# Altium PCB pcb_take2.PcbDoc (part 3 of 3)
Units mm, origin at the board's own origin, x right, y up, seen from the top; angles counter-clockwise.
Board outline 120 x 150 mm, 8 copper layers (Top Layer, Power plane, Mid-Layer 1, Mid-Layer 2, Mid-Layer 3, MidLayer4, GND plane, Bottom Layer); 176 components, 197 nets, 1014 pads, 576 vias.
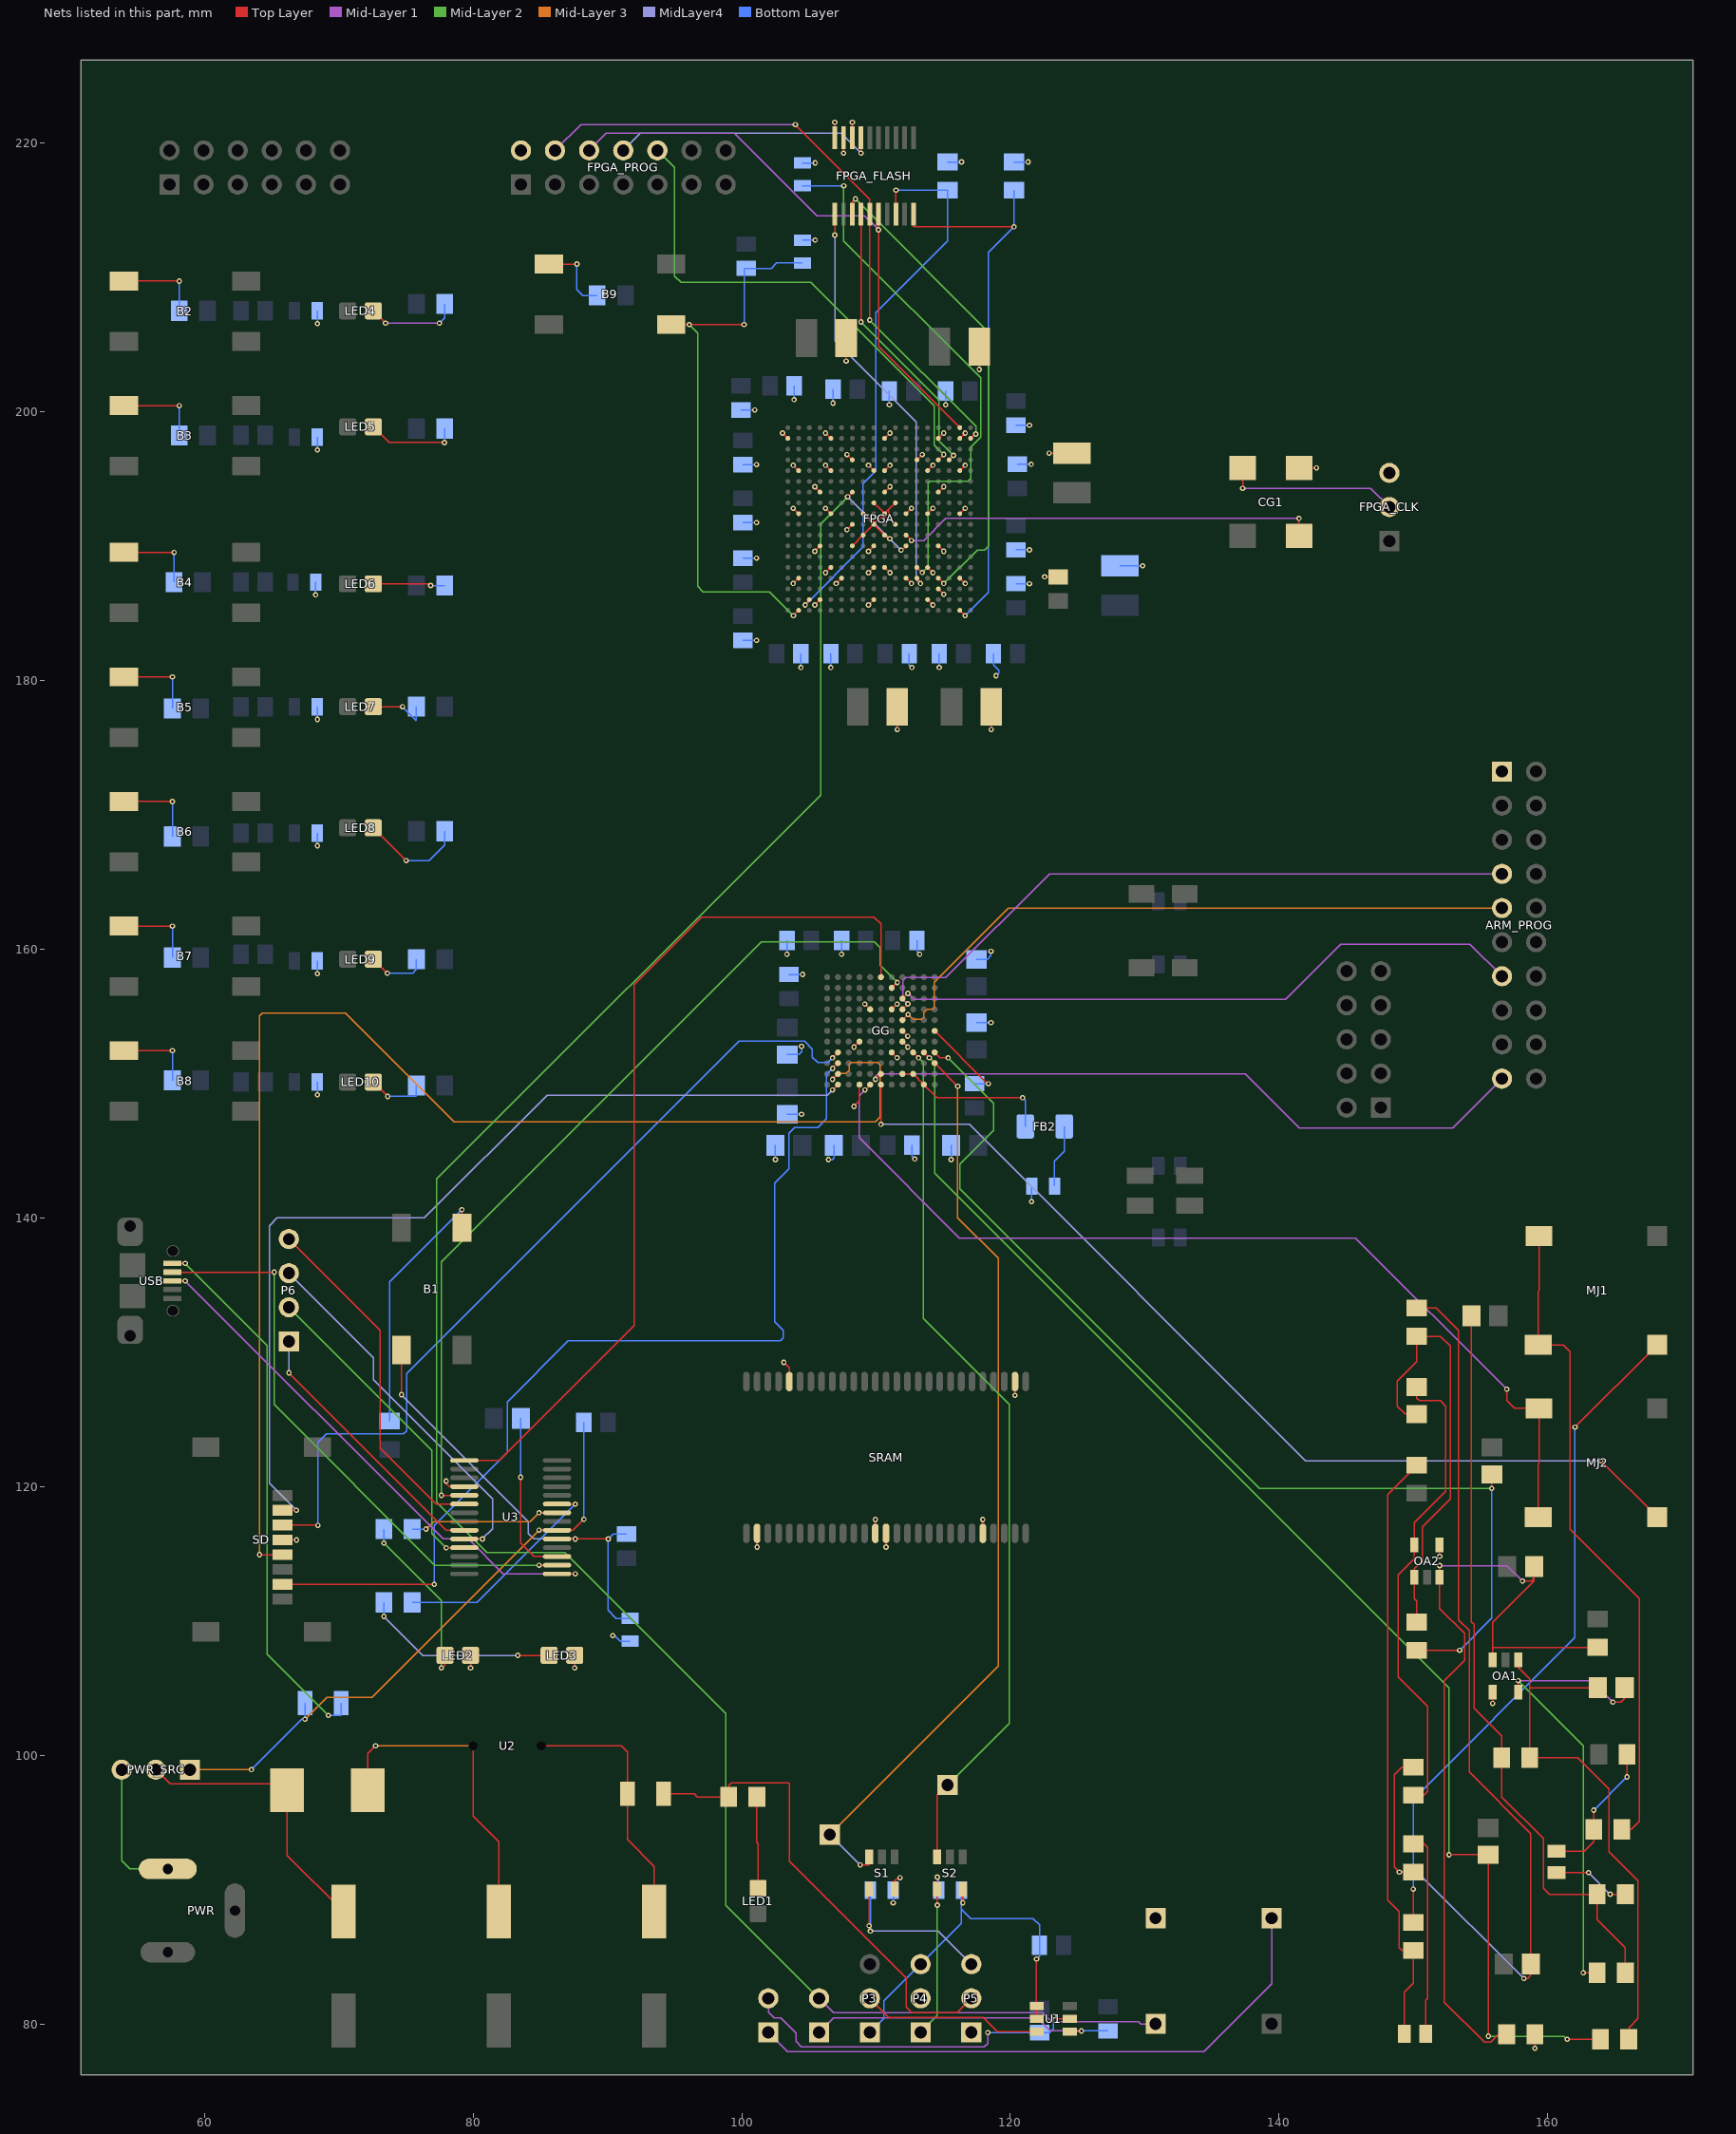
[diagram p9: the nets of this part, all layers, seen from the top]

## Via types
v1: diameter 0.4, hole 0.2, Top Layer to Bottom Layer, 576 vias

## Nets (pads, with @x,y where several pads share a name; then routed paths per layer and width w, separated by ;. In a path a pad name is that pad's centre, name@x,y a point inside that pad or via, vN(x,y) a via of type N, cw(c..) or ccw(c..) an arc to the next point about the centre after c; other vN are vias at no path point) (continued)
Net1_1: 1.1 GG.H10 R35.1 | length 100.8
  Top Layer w0.1: GG.H10@113.563,152.324 v1(113.963,151.924) ; v1(152.654,92.599) 1.1@155.575,92.599 v1(155.575,79.096) ; v1(161.442,78.867) R35.1@163.923,78.867
  Mid-Layer 2 w0.1: v1(113.963,151.924) 114.351,151.536 114.351,143.33 152.654,105.027 v1(152.654,92.599) ; v1(155.575,79.096) 161.214,79.096 v1(161.442,78.867)
Net2_1: 2.1 OA1.3 OA2.3 R36.1 R37.1 | length 63.6
  Top Layer w0.1: v1(151.953,114.122) OA2.3@151.953,113.261 151.953,110.937 153.797,109.093 153.797,107.066 152.298,105.568 152.298,81.636 155.296,78.638 155.753,78.638 156.362,79.248 R36.1@156.938,79.248 ; OA1.3@155.895,107.118 155.895,107.965 ; v1(158.115,112.979) 158.785,112.979 158.988,113.182 ; 2.1@158.988,114.046 158.988,113.182 ; R37.1@163.703,108.043 155.973,108.043 155.895,107.965 ; 155.895,107.965 155.895,109.896 158.988,112.989 158.988,113.182
  Mid-Layer 1 w0.1: v1(151.953,114.122) 156.972,114.122 v1(158.115,112.979)
Net3_1: 3.1 GG.H11 R43.1 | length 79.5
  Top Layer w0.1: GG.H11@114.363,152.324 114.77,151.917 v1(115.367,151.917) ; R43.1@150.241,107.823 v1(153.441,107.823) ; v1(155.829,119.863) 3.1@155.829,120.92
  Mid-Layer 2 w0.1: v1(115.367,151.917) 118.745,148.539 118.745,146.533 116.23,144.018 116.23,142.171 138.539,119.863 v1(155.829,119.863)
  Bottom Layer w0.1: v1(153.441,107.823) 155.829,110.211 v1(155.829,119.863)
NetARM_PROG_19: ARM_PROG.19 GG.K6 | length 50.8
  Top Layer w0.1: v1(109.957,150.317) 110.16,150.52 110.363,150.52 GG.K6@110.363,150.724
  Mid-Layer 1 w0.1: v1(109.957,150.317) 109.957,150.52 110.16,150.724 137.49,150.724 141.503,146.71 152.933,146.71 ARM_PROG.19@156.591,150.368
NetB1_1: B1.1 C51.2 R7.1 U3.19 | length 33.8
  Top Layer w0.1: v1(74.676,126.848) B1.1@74.676,130.175 ; U3.19@86.254,116.104 v1(87.605,116.103) v1(90.069,116.104)
  MidLayer4 w0.1: v1(74.676,126.848) 84.125,117.399 84.125,116.51 84.531,116.103 v1(87.605,116.103)
  Bottom Layer w0.1: C51.2@91.44,116.47 90.435,116.47 v1(90.069,116.104) 90.043,116.078 90.043,110.805 90.651,110.197 R7.1@91.69,110.197
NetB1_3: B1.3 R8.1 | length 19.3
  Top Layer w0.1: v1(79.172,140.614) 79.176,140.61 B1.3@79.176,139.275
  Bottom Layer w0.1: R8.1@73.787,124.875 73.787,135.23 v1(79.172,140.614)
NetB2_3: B2.3 R11.1 | length 6.3
  Top Layer w0.1: B2.3@54.019,209.732 v1(58.132,209.732)
  Bottom Layer w0.1: R11.1@58.132,207.518 v1(58.132,209.732)
NetB3_3: B3.3 R14.1 | length 6.3
  Top Layer w0.1: B3.3@54.019,200.461 v1(58.132,200.461)
  Bottom Layer w0.1: R14.1@58.132,198.247 v1(58.132,200.461)
NetB4_3: B4.3 R20.1 | length 5.9
  Top Layer w0.1: B4.3@54.019,189.539 v1(57.751,189.539)
  Bottom Layer w0.1: R20.1@57.751,187.325 v1(57.751,189.539)
NetB5_3: B5.3 R21.1 | length 5.9
  Top Layer w0.1: B5.3@54.019,180.268 v1(57.624,180.268)
  Bottom Layer w0.1: R21.1@57.624,177.927 v1(57.624,180.268)
NetB6_3: B6.3 R22.1 | length 6.2
  Top Layer w0.1: B6.3@54.019,170.997 v1(57.624,170.997)
  Bottom Layer w0.1: R22.1@57.624,168.402 v1(57.624,170.997)
NetB7_3: B7.3 R23.1 | length 5.9
  Top Layer w0.1: B7.3@54.019,161.726 v1(57.624,161.726)
  Bottom Layer w0.1: R23.1@57.624,159.385 v1(57.624,161.726)
NetB8_3: B8.3 R24.1 | length 5.8
  Top Layer w0.1: B8.3@54.019,152.455 v1(57.624,152.455)
  Bottom Layer w0.1: R24.1@57.624,150.241 v1(57.624,152.455)
NetB9_1: B9.1 C65.2 FPGA.V2 R47.1 | length 42.5
  Top Layer w0.1: B9.1@94.742,206.502 v1(96.088,206.502) v1(100.178,206.502) ; v1(103.848,184.836) FPGA.V2@104.236,185.224
  Mid-Layer 2 w0.1: v1(96.088,206.502) 96.723,205.867 96.723,187.007 97.13,186.601 102.083,186.601 v1(103.848,184.836)
  Bottom Layer w0.1: v1(100.178,206.502) 100.178,210.682 C65.2@100.33,210.682 102.21,210.682 102.61,211.082 R47.1@104.521,211.082
NetB9_3: B9.3 R48.1 | length 5.7
  Top Layer w0.1: B9.3@85.642,211.002 v1(87.732,211.002)
  Bottom Layer w0.1: v1(87.732,211.002) 87.732,209.118 88.189,208.661 R48.1@89.247,208.661
NetC1_1: C1.1 GG.F11 | length 6.7
  Top Layer w0.1: GG.F11@114.363,153.924 118.3,149.987 v1(118.364,149.987)
  Bottom Layer w0.1: C1.1@117.348,149.998 118.353,149.998 v1(118.364,149.987)
NetC43_1: C43.1 P2.1 U1.4 | length 23.2
  Top Layer w0.1: U1.4@124.415,79.441 125.237,79.441 v1(125.287,79.491)
  Mid-Layer 1 w0.1: P2.1@105.759,79.375 106.826,80.442 121.996,80.442 122.947,79.491 v1(125.287,79.491)
  Bottom Layer w0.1: v1(125.287,79.491) C43.1@127.254,79.491
NetC44_2: C44.2 P1.2 U1.5 | length 27
  Top Layer w0.1: v1(123.215,80.594) 123.419,80.391 U1.5@124.415,80.391
  Mid-Layer 1 w0.1: P1.2@101.981,81.915 101.981,80.874 102.413,80.442 102.921,80.442 104.038,79.324 104.038,78.715 104.445,78.308 118.059,78.308 118.313,78.562 v1(118.313,79.364)
  Bottom Layer w0.1: v1(118.313,79.364) C44.2@122.174,79.364 122.936,79.364 123.215,79.643 v1(123.215,80.594)
NetC45_1: C45.1 P3.1 P4.3 R2.1 S2.5 U1.1 U1.2 | length 28
  Top Layer w0.1: v1(116.459,89.027) S2.5@116.459,90.043 ; v1(121.945,84.836) 121.945,81.341 U1.1@121.965,81.341 U1.2@121.965,80.391
  Bottom Layer w0.1: P3.1@109.537,79.375 110.592,80.429 110.592,81.731 P4.3@113.316,84.455 116.359,87.498 116.359,88.543 ; R2.1@116.359,89.973 v1@116.359,89.127 ; v1(116.459,89.027) v1@116.359,89.127 ; v1(121.945,84.836) 122.163,85.054 C45.1@122.163,85.852 122.163,87.376 121.68,87.859 117.043,87.859 116.359,88.543 ; 116.359,88.543 116.359,89.027 v1@116.359,89.127
NetC46_1: C46.1 L1.1 PWR_SRC.2 | length 21.5
  Top Layer w0.1: PWR_SRC.2@56.388,98.933 57.455,97.866 66.167,97.866 L1.1@66.167,97.409 66.167,92.555 C46.1@70.358,88.364
NetC47_1: C47.1 L1.2 U2.1 | length 23.9
  Top Layer w0.1: L1.2@72.167,97.409 72.167,100.132 v1(72.746,100.711) ; U2.1@80.01,100.711 80.01,95.479 81.915,93.574 C47.1@81.915,88.364
  Mid-Layer 3 w0.1: v1(72.746,100.711) U2.1@80.01,100.711
NetC48_1: C48.1 FB1.1 U2.3 | length 19.3
  Top Layer w0.1: U2.3@85.09,100.711 91.034,100.711 91.487,100.258 FB1.1@91.487,97.126 91.487,93.73 93.472,91.745 C48.1@93.472,88.364
NetC50_1: C50.1 U3.17 | length 12.4
  Top Layer w0.1: v1(83.55,120.701) 83.55,115.785 84.531,114.804 U3.17@86.254,114.804
  Bottom Layer w0.1: v1(83.55,120.701) C50.1@83.55,125.095
NetC59_1: C59.1 OA1.1 R30.1 R35.2 | length 39.4
  Top Layer w0.1: OA1.1@157.795,107.118 157.795,106.543 158.657,105.681 158.657,105.029 ; C59.1@163.719,105.029 158.657,105.029 ; R35.2@166.023,78.867 166.023,79.731 166.7,80.408 166.7,90.678 164.567,92.812 164.567,97.485 162.23,99.822 R30.1@158.657,99.822 158.657,105.029
NetC59_2: C59.2 OA1.5 R34.1 | length 35.1
  Top Layer w0.1: OA1.5@157.795,104.718 v1(157.795,105.562) ; v1(162.636,83.82) R34.1@163.669,83.82 ; v1(164.846,103.962) 165.44,103.962 165.719,104.242 C59.2@165.719,105.029
  Mid-Layer 1 w0.1: v1(157.795,105.562) 163.246,105.562 v1(164.846,103.962)
  Mid-Layer 2 w0.1: v1(157.795,105.562) 162.636,100.721 v1(162.636,83.82)
NetC60_1: C60.1 R33.2 | length 5.8
  Top Layer w0.1: C60.1@160.655,91.275 v1(163.03,91.275) ; v1(164.643,89.662) R33.2@165.769,89.662
  MidLayer4 w0.1: v1(163.03,91.275) v1(164.643,89.662)
NetC60_2: C60.2 R31.2 R32.1 | length 10.6
  Top Layer w0.1: C60.2@160.655,92.875 162.707,92.875 163.415,93.583 R32.1@163.415,94.488 v1(163.415,95.919) ; v1(165.896,98.4) R31.2@165.896,100.076
  Bottom Layer w0.1: v1(163.415,95.919) v1(165.896,98.4)
NetC61_1: C61.1 R30.2 R33.1 R34.2 | length 55.7
  Top Layer w0.1: C61.1@154.321,132.715 154.321,109.949 154.505,109.765 154.505,103.5 156.557,101.448 R30.2@156.557,99.822 156.557,96.91 159.664,93.802 159.664,90.119 160.122,89.662 R33.1@163.669,89.662 163.669,87.774 165.769,85.674 R34.2@165.769,83.82
NetC62_1: C62.1 OA2.1 R38.1 R43.2 | length 32
  Top Layer w0.1: R43.2@150.241,109.923 150.241,111.481 150.053,111.669 OA2.1@150.053,113.261 150.053,113.883 150.673,114.503 150.673,117.018 152.756,119.101 152.756,130.454 152.019,131.191 R38.1@150.241,131.191 150.241,129.311 148.793,127.864 148.793,125.984 149.378,125.399 C62.1@150.241,125.399
NetC62_2: C62.2 OA2.5 R42.1 | length 35.4
  Top Layer w0.1: R42.1@149.987,97.028 150.774,97.028 151.054,97.307 151.054,103.654 148.868,105.84 148.868,113.445 150.053,114.63 OA2.5@150.053,115.661 150.053,117.312 152.4,119.659 152.4,125.984 151.994,126.39 150.444,126.39 150.241,126.594 C62.2@150.241,127.399
NetC63_1: C63.1 R41.2 | length 15.1
  Top Layer w0.1: R41.2@149.987,93.413 150.774,93.413 151.054,93.134 151.054,81.915 150.914,81.775 C63.1@150.914,79.282
NetC63_2: C63.2 R39.2 R40.1 | length 44.8
  Top Layer w0.1: C63.2@149.314,79.282 149.314,82.372 149.987,83.045 R40.1@149.987,85.471 149.149,85.471 148.92,85.7 148.92,88.392 148.082,89.23 148.082,119.405 150.241,121.564 R39.2@150.241,121.607
NetC64_1: C64.1 R38.2 R41.1 R42.2 | length 77.3
  Top Layer w0.1: R41.1@149.987,91.313 v1(148.946,91.313) 148.565,91.694 148.565,98.544 149.149,99.128 R42.2@149.987,99.128 ; R38.2@150.241,133.291 151.697,133.291 153.365,131.623 153.365,110.084 154.151,109.298 154.151,98.757 158.734,94.174 C64.1@158.734,84.455 158.734,83.626 158.496,83.388 v1(158.217,83.388)
  MidLayer4 w0.1: v1(148.946,91.313) 150.292,91.313 v1(158.217,83.388)
NetCG1_1: CG1.1 FPGA_CLK.2 | length 13
  Top Layer w0.1: v1(137.287,194.31) CG1.1@137.287,195.834
  Mid-Layer 1 w0.1: v1(137.287,194.31) 146.812,194.31 FPGA_CLK.2@148.209,192.913
NetCG1_3: CG1.3 FPGA.L12 | length 31.4
  Top Layer w0.1: FPGA.L12@112.236,190.824 v1(112.636,190.424) ; CG1.3@141.487,190.754 v1(141.487,192.066)
  Mid-Layer 1 w0.1: v1(112.636,190.424) 113.538,190.424 115.18,192.066 v1(141.487,192.066)
NetFB1_2: FB1.2 P5.2 R3.2 | length 36.1
  Top Layer w0.1: FB1.2@94.187,97.126 96.469,97.126 96.694,96.901 R3.2@99.026,96.901 99.026,97.739 99.246,97.959 103.488,97.959 103.556,97.892 103.556,92.126 112.243,83.439 112.243,81.28 112.662,80.861 116.04,80.861 P5.2@117.094,81.915
NetFB2_1: FB2.1 GG.K8 GG.K9 GG.L10 | length 11.9
  Top Layer w0.1: GG.K8@111.963,150.724 GG.K9@112.763,150.724 112.763,150.712 113.551,149.924 GG.L10@113.563,149.924 114.541,148.946 v1(120.904,148.946)
  Bottom Layer w0.1: v1(120.904,148.946) 121.105,148.745 FB2.1@121.105,146.812
NetFB2_2: FB2.2 R1.1 | length 4.7
  Bottom Layer w0.1: R1.1@123.278,142.367 123.278,144.221 124.005,144.948 FB2.2@124.005,146.812
NetFB3_1: FB3.1 USB.1 | length 40.9
  Top Layer w0.1: USB.1@57.608,136.616 v1(58.572,136.616)
  Mid-Layer 2 w0.1: v1(58.572,136.616) 64.668,130.52 64.668,107.544 v1(69.237,102.975)
  Bottom Layer w0.1: v1(69.237,102.975) 70.184,102.975 FB3.1@70.184,103.886
NetFPGA_A17: FPGA.A17 FPGA_FLASH.6 FPGA_PROG.6 | length 43.4
  Top Layer w0.1: FPGA_FLASH.6@110.18,214.701 v1(110.18,213.551) 110.18,204.88 FPGA.A17@116.236,198.824
  Mid-Layer 1 w0.1: FPGA_PROG.6@88.646,219.456 89.916,220.726 99.466,220.726 105.613,214.579 109.152,214.579 v1(110.18,213.551)
NetFPGA_B18: FPGA.B18 FPGA_FLASH.5 FPGA_PROG.4 | length 47.8
  Top Layer w0.1: v1(103.988,221.386) 109.53,215.844 FPGA_FLASH.5@109.53,214.701 v1(109.53,206.827) ; FPGA.B18@117.036,198.024 117.361,198.349 v1(117.424,198.349)
  Mid-Layer 1 w0.1: FPGA_PROG.4@86.106,219.456 88.036,221.386 v1(103.988,221.386)
  Mid-Layer 2 w0.1: v1(109.53,206.827) 117.424,198.933 v1(117.424,198.349)
NetFPGA_D15: FPGA.D15 FPGA_PROG.10 | length 37.7
  Top Layer w0.1: FPGA.D15@114.636,196.424 v1(115.036,196.825)
  Mid-Layer 2 w0.1: FPGA_PROG.10@93.726,219.456 94.996,218.186 94.996,210.109 95.479,209.626 105.156,209.626 114.325,200.457 114.325,197.535 v1(115.036,196.825)
NetFPGA_D16: FPGA.D16 FPGA_FLASH.4 | length 21.3
  Top Layer w0.1: v1(108.88,206.69) FPGA_FLASH.4@108.88,214.701 ; FPGA.D16@115.436,196.424 v1(115.767,196.755)
  Mid-Layer 2 w0.1: v1(108.88,206.69) 114.681,200.889 114.681,197.841 v1(115.767,196.755)
NetFPGA_FLASH_17: FPGA_FLASH.17 FPGA_PROG.8 | length 20
  Top Layer w0.1: v1(108.88,219.253) FPGA_FLASH.17@108.88,220.401
  MidLayer4 w0.1: FPGA_PROG.8@91.186,219.456 92.456,220.726 107.407,220.726 v1(108.88,219.253)
NetFPGA_P13: FPGA.P13 R46.1 | length 40.1
  Top Layer w0.1: FPGA.P13@113.036,188.424 113.424,188.036 v1(113.436,188.036)
  Mid-Layer 2 w0.1: v1(107.594,216.828) 107.594,212.725 117.786,202.533 117.786,198.107 117.069,197.39 117.069,195.047 116.84,194.818 113.995,194.818 113.868,194.691 113.868,188.468 v1(113.436,188.036)
  Bottom Layer w0.1: R46.1@104.521,216.828 v1(107.594,216.828)
NetFPGA_R13: FPGA.R13 FPGA_FLASH.1 | length 30.6
  Top Layer w0.1: v1(106.93,213.157) FPGA_FLASH.1@106.93,214.701 ; FPGA.R13@113.036,187.624 113.309,187.351 v1(113.309,187.223)
  MidLayer4 w0.1: v1(106.93,213.157) 106.93,205.312 113.005,199.238 113.005,187.528 v1(113.309,187.223)
NetFPGA_R15: FPGA.R15 FPGA_FLASH.3 | length 36.2
  Top Layer w0.1: FPGA_FLASH.3@108.23,214.701 108.23,215.621 v1(108.458,215.849) ; FPGA.R15@114.636,187.624 v1(115.037,187.223)
  Mid-Layer 2 w0.1: v1(108.458,215.849) 118.362,205.945 118.362,189.992 118.09,189.72 117.533,189.72 v1(115.037,187.223)
NetFPGA_U3: FPGA.U3 FPGA_FLASH.8 R44.2 | length 41.4
  Top Layer w0.1: v1(104.724,185.623) 104.724,185.712 FPGA.U3@105.036,186.024 ; FPGA_FLASH.8@111.48,214.701 v1(111.48,216.501)
  Bottom Layer w0.1: v1(104.724,185.623) 109.042,189.941 109.042,194.666 109.986,195.609 109.986,207.395 115.316,212.725 R44.2@115.316,216.501 v1(111.48,216.501)
NetFPGA_V17: FPGA.V17 FPGA_FLASH.10 R45.2 | length 42.1
  Top Layer w0.1: FPGA_FLASH.10@112.78,214.701 112.78,213.766 v1(120.269,213.766) ; FPGA.V17@116.236,185.224 v1(116.624,184.836)
  Bottom Layer w0.1: v1(116.624,184.836) 118.358,186.57 118.358,211.856 v1(120.269,213.766) R45.2@120.269,216.501
NetGG_A6: GG.A6 U3.1 | length 66.8
  Top Layer w0.1: U3.1@79.354,121.954 81.966,121.954 91.999,131.987 91.999,157.378 97.024,162.404 109.834,162.404 110.363,161.874 GG.A6@110.363,157.924
NetGG_B7: GG.B7 U3.5 | length 65.5
  Top Layer w0.1: v1(77.648,119.355) U3.5@79.354,119.354 ; GG.B7@111.163,157.124 111.57,157.531 v1(111.582,157.531)
  Mid-Layer 2 w0.1: v1(77.648,119.355) 77.648,136.728 101.473,160.553 109.88,160.553 110.312,160.122 110.312,158.801 v1(111.582,157.531)
NetGG_H9: GG.H9 S2.3 SNS_GGFP.1 | length 65.1
  Top Layer w0.1: GG.H9@112.763,152.324 v1(113.17,151.917) ; S2.3@114.559,92.443 114.559,97.033 SNS_GGFP.1@115.316,97.79
  Mid-Layer 2 w0.1: v1(113.17,151.917) 113.513,151.574 113.513,132.537 119.913,126.136 119.913,102.387 SNS_GGFP.1@115.316,97.79
NetGG_J11: GG.J11 S1.3 SNS33.1 | length 69
  Top Layer w0.1: v1(108.814,91.846) 109.479,91.846 S1.3@109.479,92.443 ; GG.J11@114.363,151.524 v1(116.078,149.809)
  Mid-Layer 3 w0.1: SNS33.1@106.553,94.107 119.101,106.655 119.101,137.008 116.078,140.03 v1(116.078,149.809)
  MidLayer4 w0.1: SNS33.1@106.553,94.107 v1(108.814,91.846)
NetGG_L5: GG.L5 MJ2.2 | length 71.9
  Top Layer w0.1: v1(109.169,149.53) 109.194,149.53 109.563,149.899 GG.L5@109.563,149.924 ; v1(156.947,127.254) 156.947,126.39 157.508,125.829 MJ2.2@159.348,125.829 159.348,121.792 159.298,121.742 MJ2.2@159.298,117.729
  Mid-Layer 1 w0.1: v1(109.169,149.53) 108.737,149.098 108.737,145.974 116.205,138.506 145.694,138.506 v1(156.947,127.254)
NetGG_L6: GG.L6 MJ2.1 | length 72.9
  Top Layer w0.1: v1(110.363,146.964) GG.L6@110.363,149.924 ; v1(163.957,121.92) MJ2.1@168.148,117.729
  MidLayer4 w0.1: v1(110.363,146.964) 116.942,146.964 141.986,121.92 v1(163.957,121.92)
NetLED1_A: LED1.A R3.1 | length 6.8
  Top Layer w0.1: R3.1@101.126,96.901 101.126,93.54 101.219,93.447 LED1.A@101.219,90.106
NetLED2_K: LED2.K R5.1 | length 13.2
  Top Layer w0.1: v1(77.648,106.502) 77.915,106.769 LED2.K@77.915,107.442
  Mid-Layer 2 w0.1: v1(73.372,115.799) 77.648,111.523 v1(77.648,106.502)
  Bottom Layer w0.1: v1(73.372,115.799) R5.1@73.372,116.84
NetLED3_K: LED3.K R6.1 | length 14.5
  Top Layer w0.1: v1(83.337,107.442) LED3.K@85.661,107.442
  MidLayer4 w0.1: v1(73.372,110.338) 76.268,107.442 v1(83.337,107.442)
  Bottom Layer w0.1: v1(73.372,110.338) R6.1@73.372,111.379
NetLED4_A: LED4.A R12.1 | length 6.9
  Top Layer w0.1: LED4.A@72.581,207.518 v1(73.495,206.604)
  Mid-Layer 1 w0.1: v1(73.495,206.604) v1(77.495,206.604)
  Bottom Layer w0.1: v1(77.495,206.604) 77.885,206.993 R12.1@77.885,208.026
NetLED5_A: LED5.A R13.1 | length 6.8
  Top Layer w0.1: LED5.A@72.581,198.882 73.749,197.714 v1(77.876,197.714)
  Bottom Layer w0.1: v1(77.876,197.714) 77.885,197.722 R13.1@77.885,198.755
NetLED6_A: LED6.A R25.1 | length 5.4
  Top Layer w0.1: LED6.A@72.581,187.198 76.717,187.198 v1(76.844,187.071)
  Bottom Layer w0.1: v1(76.844,187.071) R25.1@77.885,187.071
NetLED7_A: LED7.A R26.1 | length 4.7
  Top Layer w0.1: LED7.A@72.581,178.054 v1(74.752,178.054)
  Bottom Layer w0.1: v1(74.752,178.054) 75.785,177.021 R26.1@75.785,178.054
NetLED8_A: LED8.A R27.1 | length 7.8
  Top Layer w0.1: LED8.A@72.581,169.037 v1(75.019,166.599)
  Bottom Layer w0.1: v1(75.019,166.599) 76.733,166.599 77.885,167.75 R27.1@77.885,168.783
NetLED9_A: LED9.A R28.1 | length 4.5
  Top Layer w0.1: LED9.A@72.581,159.258 v1(73.622,158.217)
  Bottom Layer w0.1: v1(73.622,158.217) 75.506,158.217 75.785,158.496 R28.1@75.785,159.258
NetLED10_A: LED10.A R29.1 | length 4.5
  Top Layer w0.1: LED10.A@72.581,150.114 v1(73.647,149.047)
  Bottom Layer w0.1: v1(73.647,149.047) 75.785,149.047 R29.1@75.785,149.86
NetMJ1_1: MJ1.1 R40.2 | length 50.5
  Top Layer w0.1: R40.2@149.987,87.571 v1(149.987,90.043) ; v1(162.027,124.435) MJ1.1@168.148,130.556
  Bottom Layer w0.1: v1(149.987,90.043) 149.987,96.72 162.027,108.76 v1(162.027,124.435)
NetMJ1_2: MJ1.2 R32.2 | length 49.4
  Top Layer w0.1: MJ1.2@159.348,138.656 159.348,134.619 159.298,134.569 MJ1.2@159.298,130.556 161.163,130.556 161.671,130.048 161.671,116.84 166.827,111.684 166.827,95.098 166.218,94.488 R32.2@165.515,94.488
NetP3_2: P3.2 U1.3 | length 13.5
  Top Layer w0.1: P3.2@109.537,81.915 110.946,80.507 117.969,80.507 119.035,79.441 U1.3@121.965,79.441
NetP4_1: P4.1 R2.2 S2.4 | length 13.1
  Top Layer w0.1: v1(114.559,88.854) S2.4@114.559,90.043 v1(114.559,90.932)
  Mid-Layer 2 w0.1: P4.1@113.316,79.375 114.559,80.618 v1(114.559,88.854)
  Bottom Layer w0.1: v1(114.559,90.932) 114.659,90.832 R2.2@114.659,89.973
NetP5_3: P5.3 R4.1 S1.4 | length 14.5
  Top Layer w0.1: v1(109.479,87.319) S1.4@109.479,90.043
  MidLayer4 w0.1: v1(109.579,86.919) 114.63,86.919 P5.3@117.094,84.455
  Bottom Layer w0.1: v1(109.479,87.319) v1@109.579,87.419 ; v1(109.579,86.919) v1@109.579,87.419 ; R4.1@109.579,89.973 v1@109.579,87.419
NetP6_1: P6.1 U3.9 | length 20.3
  Top Layer w0.1: v1(66.294,128.473) 78.013,116.754 U3.9@79.354,116.754
  MidLayer4 w0.1: v1(66.294,128.473) P6.1@66.294,130.81
NetP6_2: P6.2 U3.11 | length 24.1
  Top Layer w0.1: v1(78.003,115.454) U3.11@79.354,115.454
  Mid-Layer 2 w0.1: P6.2@66.294,133.35 76.94,122.704 76.94,116.518 v1(78.003,115.454)
NetP6_3: P6.3 U3.10 | length 27.7
  Top Layer w0.1: U3.10@79.354,116.104 v1(80.696,116.104)
  MidLayer4 w0.1: P6.3@66.294,135.89 72.593,129.591 72.593,127.965 81.458,119.101 81.458,116.866 v1(80.696,116.104)
NetP6_4: P6.4 U3.6 | length 26.4
  Top Layer w0.1: P6.4@66.294,138.43 73.101,131.623 73.101,122.87 77.267,118.704 U3.6@79.354,118.704
NetPWR_1: PWR.1 PWR_SRC.3 | length 10.5
  Mid-Layer 2 w0.1: PWR_SRC.3@53.848,98.933 53.848,92.154 54.458,91.544 PWR.1@57.277,91.544
NetR5_2: R5.2 U3.22 | length 11.3
  Top Layer w0.1: v1(84.912,118.054) U3.22@86.254,118.054
  Mid-Layer 3 w0.1: v1(76.505,116.84) 77.064,117.399 84.257,117.399 v1(84.912,118.054)
  Bottom Layer w0.1: R5.2@75.472,116.84 v1(76.505,116.84)
NetR6_2: R6.2 U3.23 | length 16.5
  Top Layer w0.1: U3.23@86.254,118.704 v1(87.605,118.704)
  Bottom Layer w0.1: R6.2@75.472,111.379 80.28,111.379 v1(87.605,118.704)
NetU3_15: U3.15 USB.3 | length 40.4
  Top Layer w0.1: USB.3@57.608,135.316 v1(58.572,135.316) ; U3.15@86.254,113.504 87.596,113.504 v1(87.605,113.513)
  Mid-Layer 1 w0.1: v1(58.572,135.316) 77.785,116.103 79.654,116.103 82.245,113.513 v1(87.605,113.513)
NetU3_16: U3.16 USB.2 | length 43.5
  Top Layer w0.1: USB.2@57.608,135.966 v1(65.202,135.966) ; v1(84.912,114.148) 84.919,114.154 U3.16@86.254,114.154
  Mid-Layer 2 w0.1: v1(65.202,135.966) 65.202,126.111 77.165,114.148 v1(84.912,114.148)
SWCLK: ARM_PROG.9 GG.E8 | length 49.7
  Top Layer w0.1: GG.E8@111.963,154.724 v1(112.382,155.143)
  Mid-Layer 3 w0.1: v1(112.382,155.143) 112.755,154.77 113.386,154.77 113.538,154.922 113.538,155.27 113.792,155.524 114.198,155.524 114.325,155.651 114.325,157.556 119.837,163.068 ARM_PROG.9@156.591,163.068
SWDIO: ARM_PROG.7 GG.D8 | length 50.3
  Top Layer w0.1: GG.D8@111.963,155.524 v1(112.37,155.931)
  Mid-Layer 1 w0.1: v1(112.37,155.931) 112.014,156.286 112.014,157.683 112.217,157.886 115.189,157.886 122.911,165.608 ARM_PROG.7@156.591,165.608
SWO: ARM_PROG.13 GG.C8 | length 47.7
  Top Layer w0.1: GG.C8@111.963,156.324 112.357,156.718 v1(112.37,156.718)
  Mid-Layer 1 w0.1: v1(112.37,156.718) 112.801,156.286 140.48,156.286 144.569,160.376 154.203,160.376 ARM_PROG.13@156.591,157.988
US2_CLK: GG.K2 SD.5 | length 100.5
  Top Layer w0.1: v1(64.11,114.936) SD.5@65.811,114.936 ; v1(106.756,150.317) GG.K2@107.163,150.724
  Mid-Layer 3 w0.1: v1(64.11,114.936) 64.11,155.042 64.313,155.245 70.51,155.245 78.613,147.142 109.957,147.142 110.312,147.498 110.312,151.384 110.134,151.562 108.102,151.562 108.001,151.46 108.001,150.978 107.772,150.749 107.188,150.749 v1(106.756,150.317)
US2_CS: GG.L2 SD.2 | length 69.7
  Top Layer w0.1: SD.2@65.811,118.236 v1(66.853,118.236) ; v1(106.756,149.53) 106.769,149.53 GG.L2@107.163,149.924
  MidLayer4 w0.1: v1(66.853,118.236) 64.846,120.243 64.846,139.421 65.43,140.005 76.378,140.005 85.522,149.149 106.375,149.149 v1(106.756,149.53)
US2_RX: GG.J2 SD.7 | length 73.3
  Top Layer w0.1: SD.7@65.811,112.736 77.104,112.736 v1(77.114,112.725) ; v1(106.769,151.13) GG.J2@107.163,151.524
  Bottom Layer w0.1: v1(77.114,112.725) 77.114,117.119 82.55,122.555 82.55,126.314 87.097,130.861 102.895,130.861 103.098,131.064 103.098,131.652 102.464,132.286 102.464,142.596 103.505,143.637 103.505,146.304 103.937,146.736 105.664,146.736 106.324,147.396 106.324,150.685 v1(106.769,151.13)
US2_TX: GG.H2 SD.3 | length 63.7
  Top Layer w0.1: SD.3@65.811,117.136 68.436,117.136 v1(68.453,117.119) ; v1(106.756,151.917) GG.H2@107.163,152.324
  Bottom Layer w0.1: v1(68.453,117.119) 68.453,123.292 69.088,123.927 74.828,123.927 75.057,124.155 75.057,128.422 99.797,153.162 104.673,153.162 105.258,152.578 105.258,151.968 105.664,151.562 106.401,151.562 v1(106.756,151.917)
VCC12: FPGA.G7 FPGA.H9 FPGA.H11 FPGA.J8 FPGA.J10 FPGA.K9 FPGA.K11 FPGA.L8 FPGA.L10 FPGA.M7 FPGA.M12 P2.2 PWR12.1 | length 182.5
  Top Layer w0.1: v1(107.874,193.675) 107.887,193.675 FPGA.G7@108.236,194.024 ; FPGA.M7@108.236,190.024 108.236,190.031 109.029,190.824 FPGA.L8@109.036,190.824 109.036,190.843 109.817,191.624 FPGA.K9@109.836,191.624 ; FPGA.J8@109.036,192.424 109.639,191.821 110.033,191.821 ; FPGA.H9@109.836,193.224 110.32,192.74 FPGA.J10@110.633,192.421 ; v1(111.023,190.551) 110.947,190.627 110.833,190.627 FPGA.L10@110.636,190.824 FPGA.K9@109.836,191.624 ; FPGA.K11@111.436,191.624 110.952,192.108 ; FPGA.H11@111.436,193.224 110.952,192.74 ; v1(111.866,189.708) 111.92,189.708 FPGA.M12@112.236,190.024 ; FPGA.K9@109.836,191.624 110.033,191.821 ; 110.033,191.821 110.439,192.227 ; 110.439,192.227 FPGA.J10@110.633,192.421 ; 110.439,192.227 110.952,192.108 ; FPGA.J10@110.633,192.421 FPGA.J10@110.636,192.424 110.952,192.74 ; 110.952,192.108 110.952,192.74
  Mid-Layer 1 w0.1: P2.2@105.759,81.915 106.826,80.848 122.377,80.848 123.063,80.162 129.54,80.162 129.692,80.01 PWR12.1@130.81,80.01
  Mid-Layer 2 w0.1: P2.2@105.759,81.915 98.831,88.843 98.831,103.099 86.843,115.087 81.051,115.087 77.294,118.845 77.294,142.902 105.867,171.475 105.867,191.643 v1@107.886,193.662 ; v1(107.874,193.675) v1@107.886,193.662 ; v1(107.899,193.675) v1@107.886,193.662
  MidLayer4 w0.1: v1(107.899,193.675) v1(111.023,190.551) v1(111.866,189.708)
VCC18: P1.1 PWR18.1 | length 45
  Mid-Layer 1 w0.1: P1.1@101.981,79.375 103.402,77.954 134.393,77.954 139.446,83.007 PWR18.1@139.446,87.884
VCC33: ARM_PROG.1 C2.2 C3.2 C4.2 C5.2 C6.2 C7.2 C8.2 C9.2 C10.2 C11.2 C12.2 C13.2 C14.2 C15.2 C16.2 C17.2 C18.2 C19.2 C20.2 C21.2 C22.2 C23.2 C24.2 C25.2 C26.2 C27.2 C28.2 C29.2 C30.2 C31.2 C32.2 C33.2 C34.2 C35.2 C36.2 C37.2 C38.2 CG1.4 FPGA.B1 FPGA.B5 FPGA.B10 FPGA.B15 FPGA.B17 FPGA.D7 FPGA.D13 FPGA.E2 FPGA.E5 FPGA.E9 FPGA.E10 FPGA.E14 FPGA.E17 FPGA.G4 FPGA.G10 FPGA.G15 FPGA.J2 FPGA.J5 FPGA.J12 FPGA.J14 FPGA.J17 FPGA.K7 FPGA.M4 FPGA.M9 FPGA.M15 FPGA.P5 FPGA.P9 FPGA.P10 FPGA.P14 FPGA.R2 FPGA.R6 FPGA.R12 FPGA.R17 FPGA.T15 FPGA.U4 FPGA.U9 FPGA.U14 FPGA_CLK.3 FPGA_FLASH.18 FPGA_FLASH.19 FPGA_FLASH.20 GG.D5 GG.D7 GG.F8 GG.G4 GG.G8 GG.H7 GG.L4 LED2.A LED3.A OA1.4 OA2.4 P4.2 P5.1 PWR33.1 R1.2 R4.2 R7.2 R9.2 R10.2 R15.2 R16.2 R17.2 R18.2 R19.2 R36.2 R44.1 R45.1 R46.2 R47.2 S1.5 SD.4 SRAM.2 SRAM.13 SRAM.14 SRAM.23 SRAM.29 SRAM.50 U3.4 | length 104.9
  Top Layer w0.1: SD.4@65.811,116.036 v1(66.861,116.036) ; v1(78.004,120.41) 78.004,120.232 78.232,120.004 U3.4@79.354,120.004 ; v1(79.819,106.507) LED2.A@79.819,107.442 ; v1(87.566,106.507) LED3.A@87.566,107.442 ; v1(101.144,115.499) SRAM.2@101.144,116.524 ; v1(103.036,198.424) FPGA.B1@103.436,198.024 ; v1(103.138,129.255) 103.544,128.849 SRAM.50@103.544,127.824 ; v1(103.836,187.224) FPGA.R2@104.236,187.624 ; v1(103.836,192.824) FPGA.J2@104.236,192.424 ; v1(103.836,196.024) FPGA.E2@104.236,195.624 ; v1(105.436,185.624) FPGA.U4@105.836,186.024 ; v1(105.436,189.624) FPGA.M4@105.836,190.024 ; v1(105.436,194.424) FPGA.G4@105.836,194.024 ; v1(106.236,188.024) FPGA.P5@106.636,188.424 ; v1(106.236,192.824) FPGA.J5@106.636,192.424 ; v1(106.236,196.024) FPGA.E5@106.636,195.624 ; v1(106.236,198.424) FPGA.B5@106.636,198.024 ; FPGA_FLASH.20@106.93,220.401 v1(106.93,221.551) ; v1(107.036,187.224) FPGA.R6@107.436,187.624 ; v1(107.58,219.251) FPGA_FLASH.19@107.58,220.401 ; v1(107.774,203.786) C10.2@107.774,205.486 ; v1(107.836,191.224) FPGA.K7@108.236,191.624 ; v1(107.836,196.824) FPGA.D7@108.236,196.424 ; FPGA_FLASH.18@108.23,220.401 v1(108.23,221.551) ; v1(108.363,148.305) 108.763,148.705 GG.L4@108.763,149.924 ; v1(108.363,152.724) GG.G4@108.763,153.124 ; v1(109.163,155.924) GG.D5@109.563,155.524 ; v1(109.436,185.624) FPGA.U9@109.836,186.024 ; v1(109.436,188.024) FPGA.P9@109.836,188.424 ; v1(109.436,189.624) FPGA.M9@109.836,190.024 ; v1(109.436,196.024) FPGA.E9@109.836,195.624 ; SRAM.13@109.944,116.524 v1(109.944,117.549) ; FPGA.P10@110.636,188.424 v1(111.036,188.024) ; FPGA.G10@110.636,194.024 v1(111.036,194.424) ; FPGA.E10@110.636,195.624 v1(111.036,196.024) ; FPGA.B10@110.636,198.024 v1(111.036,198.424) ; v1(110.744,115.499) SRAM.14@110.744,116.524 ; GG.H7@111.163,152.324 v1(111.563,151.924) ; GG.D7@111.163,155.524 v1(111.563,155.924) ; S1.5@111.379,90.043 111.379,90.627 111.645,90.893 v1(111.785,90.893) ; v1(111.584,176.354) C6.2@111.584,178.054 ; GG.G8@111.963,153.124 v1(112.363,152.724) ; GG.F8@111.963,153.924 v1(112.363,153.524) ; FPGA.R12@112.236,187.624 v1(112.636,187.224) ; FPGA.J12@112.236,192.424 v1(112.636,192.824) ; FPGA.D13@113.036,196.424 v1(113.436,196.824) ; FPGA.U14@113.836,186.024 v1(114.236,185.624) ; FPGA.P14@113.836,188.424 v1(114.236,188.024) ; FPGA.J14@113.836,192.424 v1(114.236,192.824) ; FPGA.E14@113.836,195.624 v1(114.236,196.024) ; FPGA.T15@114.636,186.824 v1(115.036,186.424) ; FPGA.M15@114.636,190.024 v1(115.036,189.624) ; FPGA.G15@114.636,194.024 v1(115.036,194.424) ; FPGA.B15@114.636,198.024 v1(115.036,198.424) ; FPGA.R17@116.236,187.624 v1(116.636,187.224) ; FPGA.J17@116.236,192.424 v1(116.636,192.824) ; FPGA.E17@116.236,195.624 v1(116.636,196.024) ; FPGA.B17@116.236,198.024 v1(116.636,198.424) ; v1(117.68,203.151) C19.2@117.68,204.851 ; SRAM.23@117.944,116.524 v1(117.944,117.549) ; v1(118.569,176.354) C2.2@118.569,178.054 ; v1(120.344,126.799) SRAM.29@120.344,127.824 ; v1(122.546,187.717) C7.2@123.571,187.717 ; v1(122.887,196.928) C23.2@124.587,196.928 ; CG1.4@141.487,195.834 v1(142.787,195.834) ; v1(151.953,114.811) OA2.4@151.953,115.661 ; v1(155.895,103.868) OA1.4@155.895,104.718 ; v1(159.038,78.198) R36.2@159.038,79.248
  Bottom Layer w0.1: v1(68.287,186.375) R15.2@68.287,187.325 ; v1(68.414,149.164) R19.2@68.414,150.114 ; v1(68.414,158.181) R18.2@68.414,159.131 ; v1(68.414,167.706) R17.2@68.414,168.656 ; v1(68.414,177.104) R16.2@68.414,178.054 ; v1(68.414,197.17) R10.2@68.414,198.12 ; v1(68.414,206.568) R9.2@68.414,207.518 ; v1(90.404,108.915) 90.542,108.915 90.96,108.497 R7.2@91.69,108.497 ; C4.2@99.949,200.141 v1(100.974,200.141) ; C13.2@100.076,182.996 v1(101.101,182.996) ; C12.2@100.076,189.114 v1(101.101,189.114) ; C3.2@100.076,191.759 v1(101.101,191.759) ; C5.2@100.076,196.077 v1(101.101,196.077) ; v1(102.505,144.34) C33.2@102.505,145.415 ; v1(103.367,159.63) C29.2@103.367,160.655 ; C37.2@103.378,147.717 v1(104.453,147.717) ; C38.2@103.378,152.162 104.242,152.162 104.453,152.373 v1(104.453,152.772) ; C28.2@103.505,158.126 v1(104.53,158.126) ; v1(103.897,200.905) C24.2@103.897,201.93 ; v1(104.405,180.966) C25.2@104.405,181.991 ; R47.2@104.521,212.782 v1(105.471,212.782) ; R46.2@104.521,218.528 v1(105.471,218.528) ; v1(106.459,144.34) 106.73,144.34 106.865,144.475 C32.2@106.865,145.415 ; v1(106.637,180.966) C26.2@106.637,181.991 ; v1(106.796,200.651) C22.2@106.796,201.676 ; v1(107.431,159.63) C27.2@107.431,160.655 ; v1(110.987,200.524) C21.2@110.987,201.549 ; v1(111.279,89.023) R4.2@111.279,89.973 ; C11.2@112.47,181.991 112.47,181.169 v1(112.673,180.966) ; C31.2@112.676,145.415 112.676,144.593 v1(112.879,144.39) ; C30.2@113.041,160.655 113.041,159.833 v1(113.244,159.63) ; v1(114.702,180.966) C9.2@114.702,181.991 ; v1(115.178,200.524) C20.2@115.178,201.549 ; R44.1@115.316,218.601 v1(116.366,218.601) ; v1(115.586,144.34) C34.2@115.586,145.415 ; C35.2@117.475,154.543 v1(118.55,154.543) ; C36.2@117.475,159.242 118.28,159.242 118.55,159.512 v1(118.55,159.852) ; C8.2@118.734,181.991 118.734,181.169 119.14,180.763 119.14,180.56 v1(118.937,180.356) ; R45.1@120.269,218.601 v1(121.319,218.601) ; C15.2@120.396,187.209 v1(121.421,187.209) ; C16.2@120.396,189.727 v1(121.421,189.727) ; C18.2@120.396,198.998 v1(121.421,198.998) ; C17.2@120.523,196.099 v1(121.548,196.099) ; v1(121.578,141.214) R1.2@121.578,142.367 ; C14.2@128.143,188.546 v1(129.843,188.546)
VCC33V: FPGA_PROG.2
VCC_USB_SUPPLY: C49.2 FB3.2 PWR_SRC.1 U3.20 | length 45.5
  Top Layer w0.1: v1(84.912,116.764) 84.922,116.754 U3.20@86.254,116.754 87.442,116.754 v1(88.254,117.566)
  Mid-Layer 3 w0.1: PWR_SRC.1@58.928,98.933 v1(63.5,98.933) ; v1(67.488,102.692) 69.113,104.318 72.466,104.318 v1(84.912,116.764)
  Bottom Layer w0.1: v1(63.5,98.933) 67.259,102.692 v1@67.484,102.696 ; FB3.2@67.484,103.886 v1@67.484,102.696 ; v1(67.488,102.692) v1@67.484,102.696 ; v1(88.254,117.566) C49.2@88.254,124.795
pads on no net: ARM_PROG.2 ARM_PROG.3 ARM_PROG.5 ARM_PROG.11 ARM_PROG.15 ARM_PROG.17 B1.2 B1.4 B2.2 B2.4 B3.2 B3.4 B4.2 B4.4 B5.2 B5.4 B6.2 B6.4 B7.2 B7.4 B8.2 B8.4 B9.2 B9.4 FB2.0 FPGA.A9 FPGA.A10 FPGA.A11 FPGA.A12 FPGA.A13 FPGA.A14 FPGA.A15 FPGA.A16 FPGA.B9 FPGA.B11 FPGA.B12 FPGA.B14 FPGA.B16 FPGA.C1 FPGA.C2 FPGA.C4 FPGA.C9 FPGA.C10 FPGA.C11 FPGA.C12 FPGA.C13 FPGA.C14 FPGA.C15 FPGA.D1 FPGA.D2 FPGA.D3 FPGA.D4 FPGA.D11 FPGA.D12 FPGA.D14 FPGA.E1 FPGA.E3 FPGA.E4 FPGA.E6 FPGA.E7 FPGA.E8 FPGA.E11 FPGA.E12 FPGA.E13 FPGA.F1 FPGA.F2 FPGA.F3 FPGA.F4 FPGA.F5 FPGA.F6 FPGA.F7 FPGA.F8 FPGA.F9 FPGA.F10 FPGA.F11 FPGA.F12 FPGA.F13 FPGA.G1 FPGA.G3 FPGA.G6 FPGA.G8 FPGA.G9 FPGA.G11 FPGA.H1 FPGA.H2 FPGA.H3 FPGA.H4 FPGA.H5 FPGA.H6 FPGA.H7 FPGA.J1 FPGA.J3 FPGA.J6 FPGA.J7 FPGA.K1 FPGA.K2 FPGA.K3 FPGA.K4 FPGA.K5 FPGA.K6 FPGA.K14 FPGA.L1 FPGA.L2 FPGA.L3 FPGA.L4 FPGA.L5 FPGA.L6 FPGA.L7 FPGA.L13 FPGA.M1 FPGA.M3 FPGA.M5 FPGA.M8 FPGA.M10 FPGA.M11 FPGA.M14 FPGA.N1 FPGA.N2 FPGA.N3 FPGA.N4 FPGA.N5 FPGA.N6 FPGA.N7 FPGA.N8 FPGA.N9 FPGA.N10 FPGA.N11 FPGA.N15 FPGA.N16 FPGA.P1 FPGA.P2 FPGA.P3 FPGA.P4 FPGA.P6 FPGA.P7 FPGA.P8 FPGA.P11 FPGA.P12 FPGA.P15 FPGA.P16 FPGA.P17 FPGA.P18 FPGA.R3 FPGA.R5 FPGA.R7 FPGA.R8 FPGA.R10 FPGA.R11 FPGA.T1 FPGA.T2 FPGA.T3 FPGA.T4 FPGA.T5 FPGA.T6 FPGA.T7 FPGA.T8 FPGA.T9 FPGA.T10 FPGA.T11 FPGA.T12 FPGA.T13 FPGA.T14 FPGA.T17 FPGA.T18 FPGA.U1 FPGA.U2 FPGA.U5 FPGA.U7 FPGA.U8 FPGA.U10 FPGA.U11 FPGA.U13 FPGA.U15 FPGA.U16 FPGA.U17 FPGA.U18 FPGA.V3 FPGA.V4 FPGA.V5 FPGA.V6 FPGA.V7 FPGA.V8 FPGA.V9 FPGA.V10 FPGA.V11 FPGA.V12 FPGA.V13 FPGA.V14 FPGA.V15 FPGA.V16 FPGA_FLASH.2 FPGA_FLASH.7 FPGA_FLASH.9 FPGA_FLASH.12 FPGA_FLASH.13 FPGA_FLASH.14 FPGA_FLASH.15 FPGA_FLASH.16 FPGA_PROG.12 FPGA_PROG.14 GG.B8 GG.B10 GG.B11 GG.E5 GG.E6 GG.E7 GG.F5 GG.F6 GG.F7 GG.G5 GG.G6 GG.G7 LED1.0 LED2.0 LED3.0 LED4.0 LED5.0 LED6.0 LED7.0 LED8.0 LED9.0 LED10.0 S1.1 S2.1 SD. SD.1 SD.8 SRAM.40 SRAM.43 U3.2 U3.3 U3.8 U3.12 U3.13 U3.14 U3.24 U3.28 USB. USB.4 X1.3 X1.4

## Polygon pours and split planes (outlines as drawn)
GND on GND plane (split plane): 170.29,76.71 51.31,76.71 51.31,225.69 170.29,225.69
VCC33 on Power plane (split plane): 170.29,76.71 51.31,76.71 51.31,225.69 170.29,225.69

## Keep-outs
Keep-Out Layer:
  lines w0.3: 52.1,77.5 52.1,224.9 169.5,224.9 169.5,77.5 52.1,77.5

## Text inside footprints (layer, text, board x,y; h text height)
ARM_PROG: Top Overlay "20" at 158.623,148.844 h1.27 r270; Top Overlay "19" at 156.083,148.844 h1.27 r270; Top Overlay "1" at 156.083,175.768 h1.27 r270; Top Overlay "2" at 158.623,175.768 h1.27 r270
FPGA_GPIO: Top Overlay "12" at 72.136,218.948 h1.27; Top Overlay "1" at 73.152,216.408 h1.27; Top Overlay "1" at 72.136,216.408 h1.27; Top Overlay "1" at 54.864,216.408 h1.27; Top Overlay "2" at 54.864,218.948 h1.27
FPGA_PROG: Top Overlay "2" at 80.518,218.948 h1.27; Top Overlay "1" at 80.518,216.408 h1.27; Top Overlay "14" at 100.838,218.948 h1.27; Top Overlay "13" at 100.838,216.408 h1.27
GPIO: Top Overlay "10" at 145.542,159.893 h1.27 r90; Top Overlay "9" at 148.082,159.893 h1.27 r90; Top Overlay "1" at 148.082,146.177 h1.27 r90; Top Overlay "2" at 145.542,145.669 h1.27 r90